# Altium PCB PCB_OLED.PcbDoc
Units mm, origin at the board's own origin, x right, y up, seen from the top; angles counter-clockwise.
Board outline 29.07 x 49.53 mm, 2 copper layers (Top Layer, Bottom Layer), stack 1.622 mm thick; 12 components, 8 nets, 81 pads, 20 vias.
Unrouted connection lines stored in the file: 2.
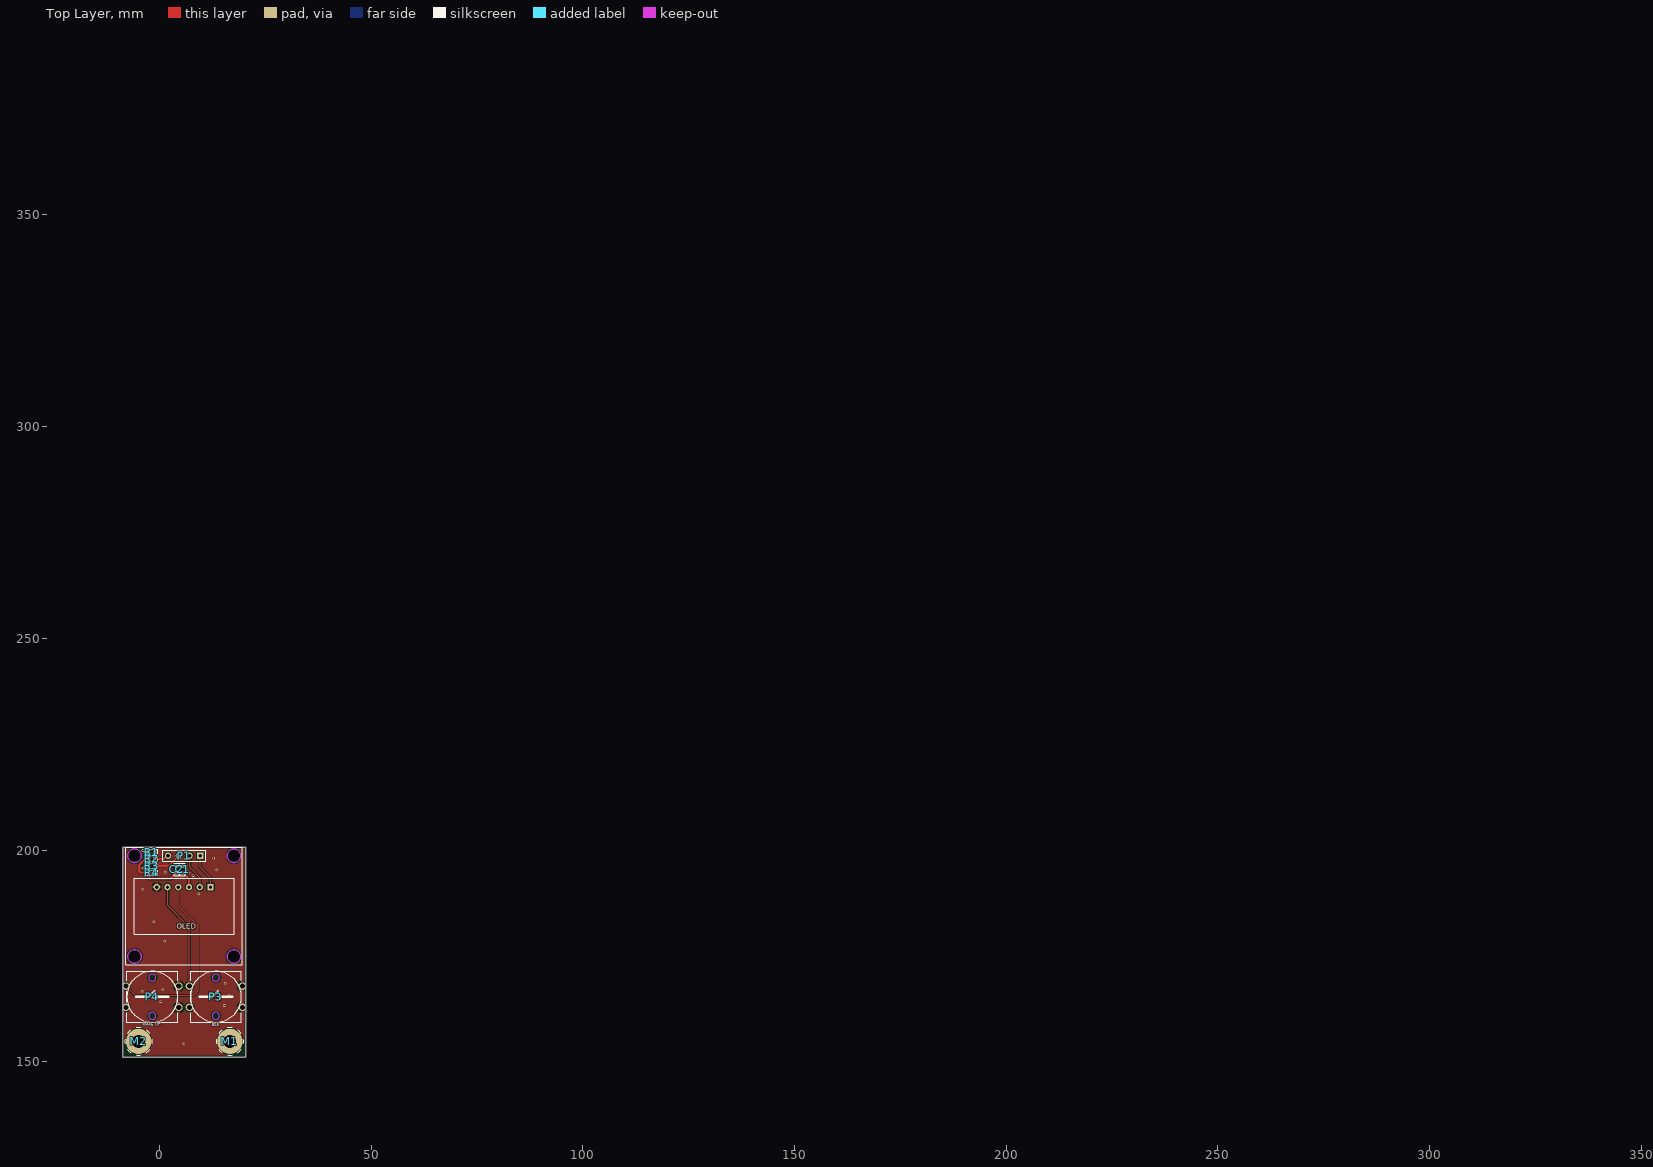
[diagram p0: Top Layer view]
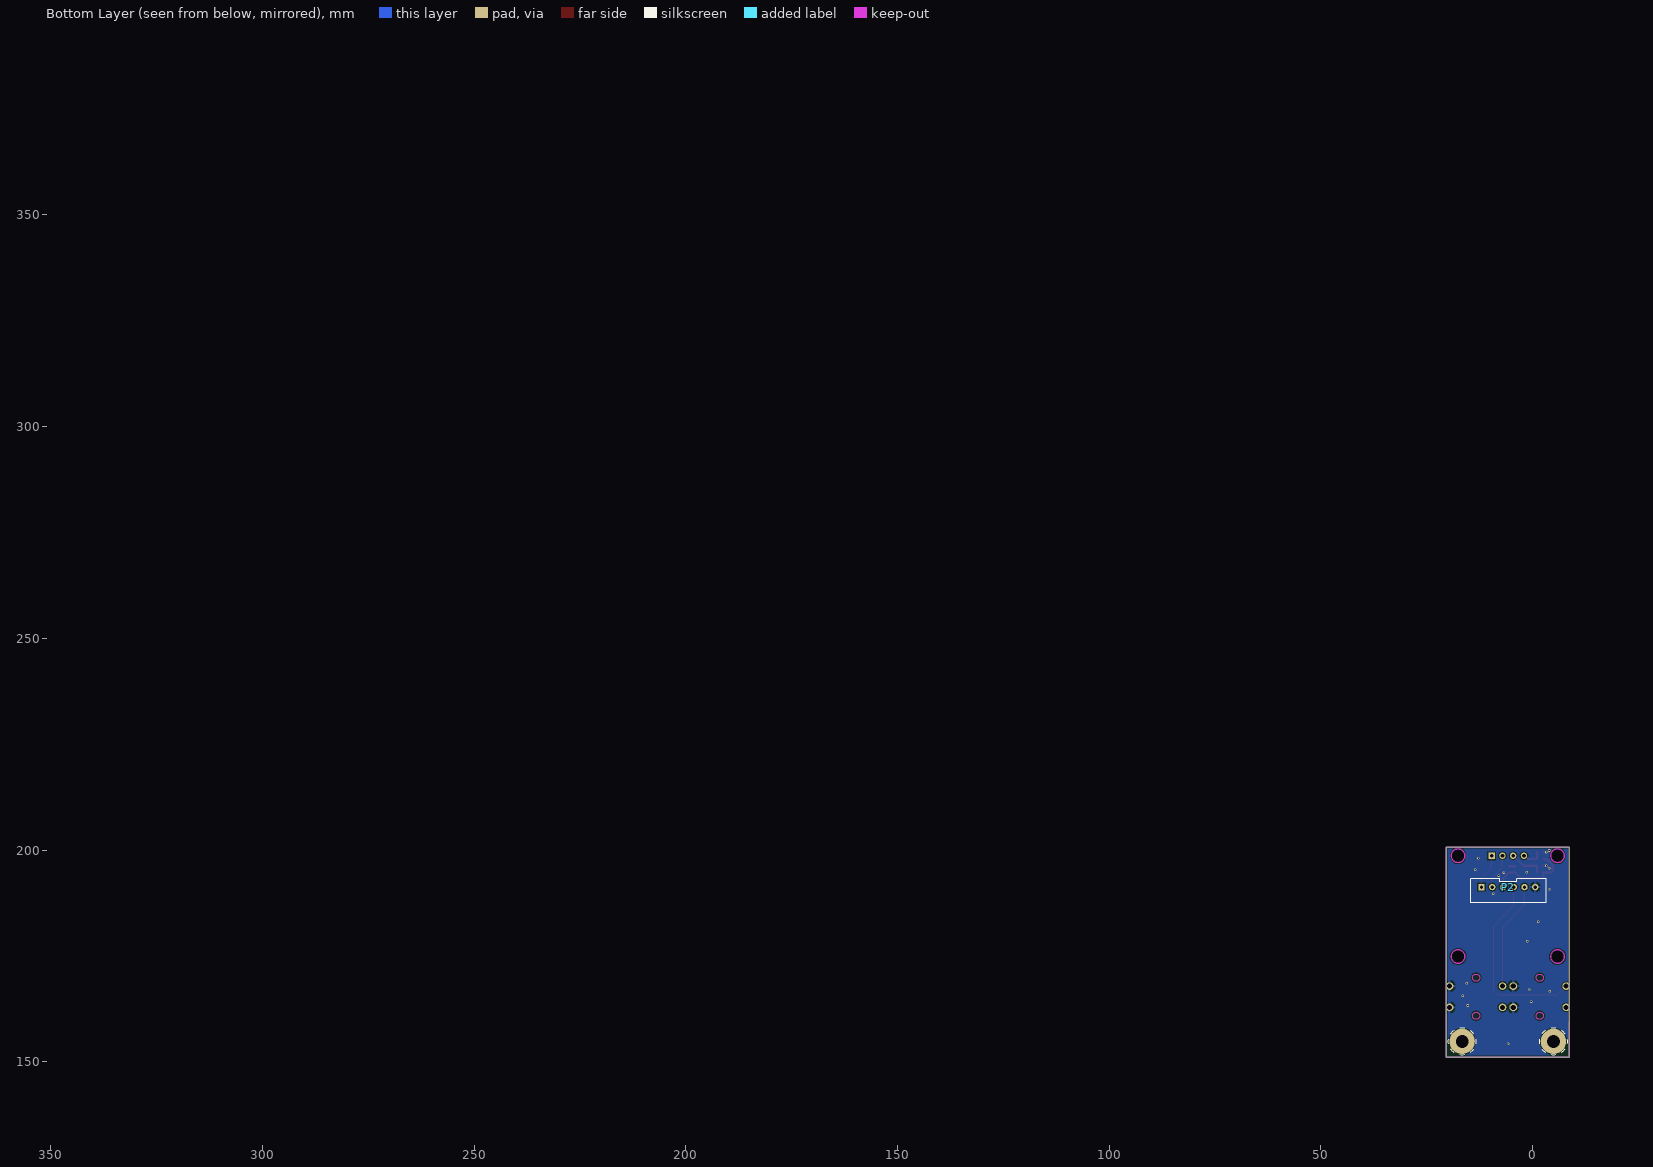
[diagram p1: Bottom Layer view, seen from below]
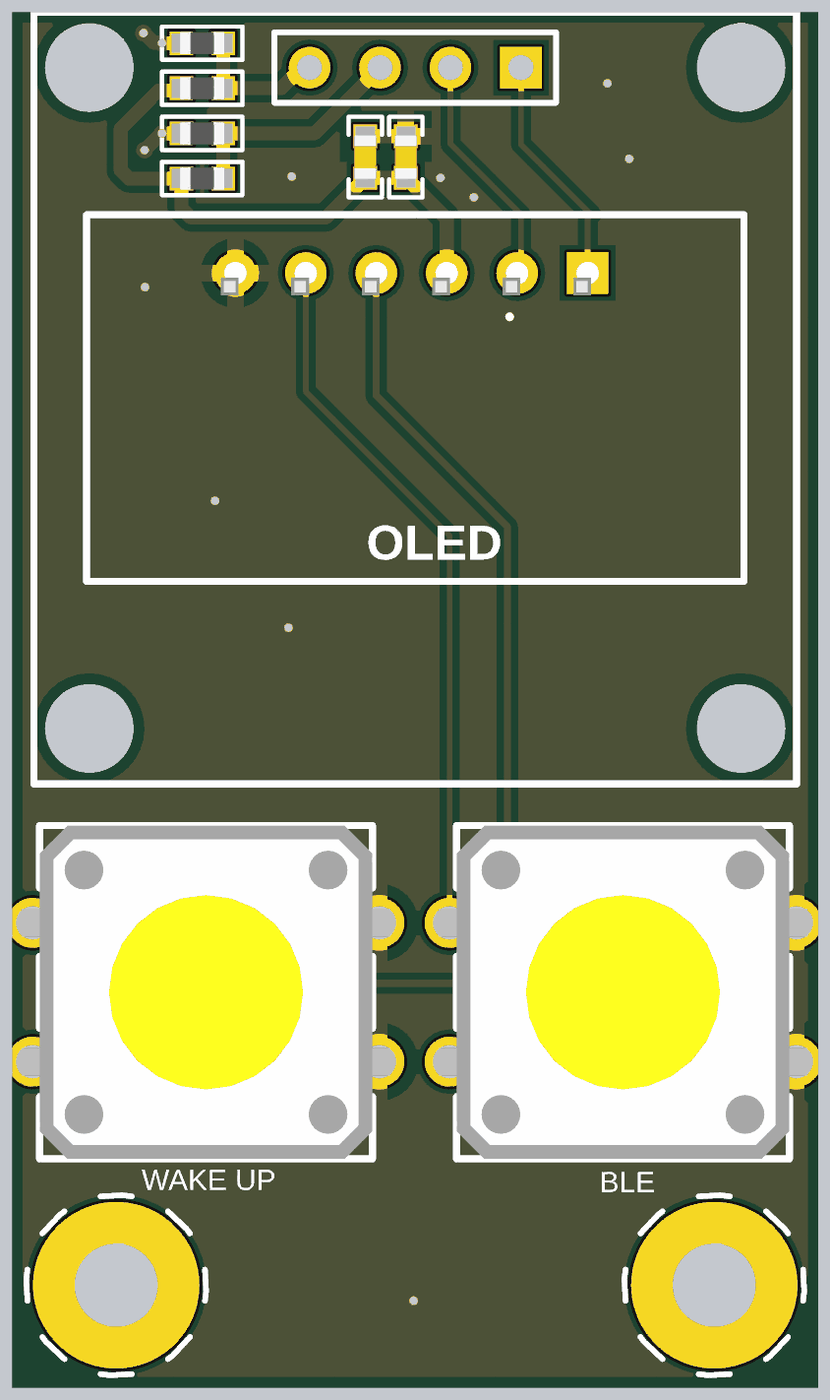
[diagram p2: 3D render of the assembled board from above, using the file's embedded part models]

## Layer stack, top to bottom
Top Solder: solder mask 0.01, Solder Resist, Dk 3.5
Top Layer: signal copper 0.036
Dielectric 1: dielectric 1.55, FR-4, Dk 4.8
Bottom Layer: signal copper 0.036
Bottom Solder: solder mask 0.01, Solder Resist, Dk 3.5

## Board outline
-8.687,151.13 -8.687,159.475 -8.687,200.662 5.85,200.662 20.387,200.662 20.387,159.475 20.387,151.13
cut-out: 17.6,197.062 cw(c17.6,198.662) 16,198.662 cw(c17.6,198.662) 17.6,200.262 cw(c17.6,198.662) 19.2,198.662 cw(c17.6,198.662)
cut-out: 17.6,173.262 cw(c17.6,174.862) 16,174.862 cw(c17.6,174.862) 17.6,176.462 cw(c17.6,174.862) 19.2,174.862 cw(c17.6,174.862)
cut-out: -5.9,173.262 cw(c-5.9,174.862) -7.5,174.862 cw(c-5.9,174.862) -5.9,176.462 cw(c-5.9,174.862) -4.3,174.862 cw(c-5.9,174.862)
cut-out: -5.9,197.062 cw(c-5.9,198.662) -7.5,198.662 cw(c-5.9,198.662) -5.9,200.262 cw(c-5.9,198.662) -4.3,198.662 cw(c-5.9,198.662)

## Design rules (kind name [scope] priority, off if disabled: settings)
Clearance RF [InNet('RF4') or InNet('RF5') or InNet('RF_N1') or InNet('RF_N2') or InNet('RF_N3') or InNet('RF_P1') or InNet('RF_P2')] p1: gap=0.153 ignorepadtopadclearanceinfootprint=FALSE
Clearance bighole [HoleSize>3 vs InPolygon] p2: gap=1.3 ignorepadtopadclearanceinfootprint=FALSE
Clearance "SMALL PAD" [(PadXSize_AllLayers<0.46) or (PadYSize_AllLayers<0.86)] p3: gap=0.2 ignorepadtopadclearanceinfootprint=FALSE except(0.1: THPad-THPad; 0.15: Track-Track Track-SMDPad Track-THPad Track-Region SMDPad-SMDPad SMDPad-Region Region-Region; 0.254: Track-Poly SMDPad-Poly)
Clearance [All] p4: gap=0.254 ignorepadtopadclearanceinfootprint=FALSE except(0.19: Track-Region SMDPad-Region; 0.203: Arc-Track Arc-SMDPad Track-Track Track-SMDPad SMDPad-SMDPad)
HoleSize [All] p1: absolutevalues=TRUE maxlimit=5 minlimit=0.025 maxpercent=80.000 minpercent=20.000
HoleToHoleClearance [All] p1: gap=0 allowstackedmicrovias=TRUE
MinimumSolderMaskSliver [All] p1: minsoldermaskwidth=0
PolygonConnect "big hole" [(PadXSize_AllLayers>0.9)or  (PadySize_AllLayers<0.9)] p1: thpad.connectstyle=Relief thpad.reliefconductorwidth=0.6 thpad.reliefentries=4 thpad.polygonreliefangle="90 Angle" thpad.airgapwidth=0.5 smdpad.connectstyle=Relief smdpad.reliefconductorwidth=0.6 smdpad.reliefentries=4 smdpad.polygonreliefangle="90 Angle" smdpad.airgapwidth=0.5 via.connectstyle=Direct via.reliefconductorwidth=0.254 via.reliefentries=4 via.polygonreliefangle="90 Angle" via.airgapwidth=0.254
PolygonConnect [All] p2: thpad.connectstyle=Relief thpad.reliefconductorwidth=0.5 thpad.reliefentries=4 thpad.polygonreliefangle="90 Angle" thpad.airgapwidth=0.4 smdpad.connectstyle=Relief smdpad.reliefconductorwidth=0.5 smdpad.reliefentries=4 smdpad.polygonreliefangle="90 Angle" smdpad.airgapwidth=0.4 via.connectstyle=Direct via.reliefconductorwidth=0.254 via.reliefentries=4 via.polygonreliefangle="90 Angle" via.airgapwidth=0.254
RoutingVias [All] p1: holewidth=0.3 width=0.6 viastyle="Through Hole" minholewidth=0.3 minwidth=0.6 maxholewidth=0.3 maxwidth=0.6
SilkToSilkClearance [All] p1: silktosilkclearance=0
SilkToSolderMaskClearance [IsPad] p1: minsilkscreentomaskgap=0 clearancetoexposedcopper=TRUE
SolderMaskExpansion [All] p1: expansion=0.102
Width [All] p1: maxlimit=5 minlimit=0.1 preferedwidth=0.254
25 further rules are at their usual default settings.

## Components (designator, comment, footprint, x,y, rotation, side; value= is the part's Value field where it differs from the comment)
C1 "104/50V" "CAPC-0603 (1608) - HD" 5.512,195.441 r270 top
C2 "106/10V" "CAPC-0603 (1608) - HD" 4.05,195.441 r270 top
M1 "HOLE" HOLE_3MM_6MM 16.632,154.811 r0 top
M2 "HOLE" HOLE_3MM_6MM -4.932,154.811 r0 top
P1 "Header 4P" HDR1X4 9.66,198.662 r180 top
P2 "XH2.54mm" XH2.54-6p 6.985,191.262 r180 bottom
P3 "=Value" "B3F BUTTON" 13.339,165.362 r0 top
P4 "=Value" "B3F BUTTON" -1.693,165.362 r0 top
R1 "0R" "RESC-0603 (1608) - HD" -1.829,199.542 r180 top
R2 "NF" "RESC-0603 (1608) - HD" -1.829,197.918 r180 top value=0R
R3 "NF" "RESC-0603 (1608) - HD" -1.829,196.293 r180 top value=0R
R4 "0R" "RESC-0603 (1608) - HD" -1.829,194.668 r180 top

## Footprints (in the part's own frame and the unit in brackets; to place one, negate y for a bottom-side part, rotate by r counter-clockwise, add the part's x,y. Pads: shape width x height; smd on the part's side, far side on the other; paste and mask are expansions set on the pad)
"B3F BUTTON" [mm]
  round 1.8 hole 1.2: 1(-6.25,2.5) 2(6.25,2.5) 3(-6.25,-2.5) 4(6.25,-2.5)
  Keep-Out Layer circle w0.254: c0,4.5 r0.85
  Keep-Out Layer circle w0.254: c0,-4.5 r0.85
  silkscreen extent -6,-6 6,6, body extent -7,-6 7,6, height 7.4
"CAPC-0603 (1608) - HD" [mm] "Resistor, Chip; 1.60 mm L X 0.80 mm W X 0.50 mm H body"
  rect 0.85x0.85 smd paste-0.075 mask+0.1: 1(-0.75,0) 2(0.75,0)
  silkscreen extent -1.45,-0.6 1.45,0.6, body extent -0.8,-0.4 0.8,0.4, height 0.6
HDR1X4 [mm] "Connector; Header; 4 Position"
  rect 1.5x1.5 hole 0.9: 1(0,0)
  round 1.5 hole 0.9: 2(2.54,0) 3(5.08,0) 4(7.62,0)
  silkscreen extent -1.27,-1.27 8.89,1.27
HOLE_3MM_6MM [mm]
  round 6 hole 3: 0(0,0)
  silkscreen extent -3.25,-3.25 3.25,3.25
"RESC-0603 (1608) - HD" [mm] "Resistor, Chip; 1.60 mm L X 0.80 mm W X 0.50 mm H body"
  rect 0.85x0.85 smd paste-0.075 mask+0.1: 1(-0.751,0) 2(0.749,0)
  silkscreen extent -1.45,-0.6 1.45,0.6, body extent -0.8,-0.4 0.8,0.4, height 0.5
XH2.54-6p [mm]
  rect 1.5x1.5 hole 0.8: 1(-5.08,0)
  round 1.5 hole 0.8: 2(-2.54,0) 3(0,0) 4(2.54,0) 5(5.08,0) 6(7.62,0)
  silkscreen extent -7.62,-3.7 10.16,2, body extent -7.21,-3.84 10.16,2, height 7.21

## Part data
C1: library part C0603C104K5RACTU, "CAP CER 0.1uF 50V 10% X7R 0603", MFR=KEMET, Company ID=VT00574, MPN=C0603C104K5RACTU, Solder=SMT
C2: library part CL10A106KP8NNNC, "CAP CER 10uF 10% 10V X5R 0603", MFR="Samsung Electro-Mechanics", Category=Capacitor, Conpany ID=VT00807, MPN=CL10A106KP8NNNC, Solder=SMT
M1 M2: library part HOLE_2_4/2_5/3_5/3_6, "HOLE 2_4/2_5/3_5/3_6", MPN=None, ClassName=MECH_HOLE, CompanyID=VT-, Solder="Not Fill"
P1: library part "Header 4x1", "Header, 4 Pin Pitch 2.54mm", MPN=S1012EC-40-ND, Company ID=VT-00125, Solder=WAVE
P2: library part XH2.54-6p, "XH2.54mmm - 6P 180 degree", MFR=CHINA, MPN=XH2.54-6P
P3 P4: library part B3F, "BUTTON 12X12X7.3MM", Category=Button, MPN=B3F, Solder=Wave, URL=http://linhkienchatluong.vn/nut-nhan-12x12-4p-dip/nut-nhan-4-chan-12x12x73mm-b3f-4055_sp689_ct1833.aspx
R1 R2 R3 R4: library part RC0603FR-070RL, "RES SMD 0.0OHM JUMPER 1/10W 0603", MFR=Yageo, Category=Resistor, Company ID=VT00423, MPN=RC0603FR-070RL, Solder=SMT

## Free pads (board coordinates)
  round 3.668 on Mech1: 1(-18.961,200.752) 1(4.039,138.252) 1(4.039,218.252) 1(27.039,200.752)
  round 0.254 on Keep-Out: 1(-17.961,225.152) 1(-17.961,225.152) 1(-17.961,225.152)
  round 0.254 on Mech1: 1(2.331,218.252) 1(5.746,218.252)
  round 0.254 on Mech2: 1(283.171,304.082) 1(283.171,304.082) 1(283.171,304.082) 1(283.171,380.082) 1(283.171,380.082) 1(283.171,380.082) 1(285.171,302.082) 1(285.171,302.082) 1(285.171,382.082) 1(285.171,382.082) 1(290.071,297.182) 1(290.071,297.182) 1(290.071,386.982) 1(290.071,386.982) 1(292.071,295.182) 1(292.071,295.182) 1(292.071,295.182) 1(292.071,388.982) 1(292.071,388.982) 1(292.071,388.982) 1(336.071,295.182) 1(336.071,295.182) 1(336.071,295.182) 1(336.071,388.982) 1(336.071,388.982) 1(336.071,388.982) 1(338.071,297.182) 1(338.071,297.182) 1(338.071,386.982) 1(338.071,386.982) 1(342.971,302.082) 1(342.971,382.082) 1(342.971,302.082) 1(342.971,382.082) 1(344.971,304.082) 1(344.971,304.082) 1(344.971,304.082) 1(344.971,380.082) 1(344.971,380.082) 1(344.971,380.082)

## Via types
v1: diameter 0.6, hole 0.3, Top Layer to Bottom Layer, tented both sides, 20 vias

## Nets (pads, with @x,y where several pads share a name; then routed paths per layer and width w, separated by ;. In a path a pad name is that pad's centre, name@x,y a point inside that pad or via, vN(x,y) a via of type N, cw(c..) or ccw(c..) an arc to the next point about the centre after c; other vN are vias at no path point)
+3V3: C1.2 C2.2 P2.3 R2.2 R4.2 | length 20.5
  Top Layer w0.5: R2.2 -2.658,197.838 -3.409,197.838 -3.702,197.545 -3.702,197.531 -4.769,196.464 -4.769,194.961 -4.476,194.668 R4.2 -2.578,193.611 -2.229,193.262 2.621,193.262 C2.2 C1.2 6.985,193.218 P2.3
BLE_BTN: P2.4 P4.1 P4.2 | length 44.9
  Top Layer w0.254: P4.1 -5.765,165.684 8.103,165.684 9.169,166.751 9.169,182.118 4.445,186.842 P2.4
GND: C1.1 C2.1 P2.6 P3.4 P4.4 R1.2 R3.2 | length 4.6
  Top Layer w0.5: v1(-3.948,199.905) -3.921,199.905 -3.577,199.562 -3.299,199.562 v1(-3.28,199.542) R1.2 ; v1(-3.909,195.693) -3.895,195.693 -3.295,196.293 v1(-3.28,196.293) R3.2 ; C2.1 C1.1
  other v1: 5.791,154.254 15.291,163.297 0.279,164.235 16.51,165.608 -4.039,166.634 0.769,166.969 15.519,168.568 1.28,178.49 -1.367,183.062 9.254,189.687 -3.895,190.756 7.963,193.989 6.758,194.691 1.399,194.739 13.564,195.377 12.776,198.095
NetP1_3: P1.3 R3.1 R4.1 | length 8.3
  Top Layer w0.5: R4.1 R3.1 2.21,196.293 P1.3
NetP1_4: P1.4 R1.1 R2.1 | length 5.1
  Top Layer w0.5: R1.1 R2.1 1.025,197.918 1.769,198.662 P1.4
SCL: P1.2 P2.2 | length 8.8
  Top Layer w0.203: P1.2 7.12,195.902 9.66,193.362 9.66,191.795 9.254,191.389 9.381,191.262 P2.2
SDA: P1.1 P2.1 | length 8.5
  Top Layer w0.203: P1.1 9.66,195.902 12.2,193.362 12.065,193.227 P2.1
WAKEUP_BTN: P2.5 P3.1 P3.2 | length 25.5
  Top Layer w0.203: P2.5 1.905,186.995 7.089,181.81 P3.1
pads on no net: M1.0 M2.0 P3.3 P4.3

## Polygon pours and split planes (outlines as drawn)
GND on Bottom Layer "GND_L02_P001" (solid, remove dead copper, pour order 1): -8.687,200.662 -8.687,151.13 20.387,151.13 20.387,200.662
GND on Top Layer "GND_L01_P000" (solid, remove dead copper, pour order 0): -8.687,200.662 -8.687,151.13 20.387,151.13 20.387,200.662

## Keep-outs
Keep-Out Layer:
  circle w0.254: c17.6,198.662 r1.6
  circle w0.254: c-5.9,198.662 r1.6
  circle w0.254: c-5.9,174.862 r1.6
  circle w0.254: c17.6,174.862 r1.6
  lines w0.254: -8.687,151.13 -8.687,159.475 -8.687,200.662 5.85,200.662 20.387,200.662 20.387,159.475 20.387,151.13 -8.687,151.13

## Silkscreen, mask and mechanical layers (free items; w line width, h text height)
Top Overlay:
  circle w0.254: c13.339,165.362 r6
  circle w0.254: c-1.693,165.362 r6
  lines w0.254: -7.9,172.862 19.6,172.862 19.6,200.662 -7.9,200.662 -7.9,172.862 ; -6,180.162 -6,193.362 5.85,193.362 17.7,193.362 17.7,180.162 -6,180.162
  text "OLED" at 4.089,180.948 h2
  text "WAKE UP" at -4.013,158.242 h1.2
  text "BLE" at 12.497,158.166 h1.2
Mechanical 1:
  lines w0.254: -25.861,216.252 cw(c-24.861,216.252) -24.861,217.252 ccw(c-24.861,223.152) -18.961,223.152 cw(c-17.961,223.152) -17.961,224.152 ; 26.039,224.152 cw(c26.039,223.152) 27.039,223.152 ccw(c32.939,223.152) 32.939,217.252 cw(c32.939,216.252) 33.939,216.252
Mechanical 2:
  lines w0.254: 283.171,304.082 ccw(c285.171,304.082) 285.171,302.082 cw(c285.171,297.182) 290.071,297.182 ccw(c292.071,297.182) 292.071,295.182 336.071,295.182 ccw(c336.071,297.182) 338.071,297.182 cw(c342.971,297.182) 342.971,302.082 ccw(c342.971,304.082) 344.971,304.082 344.971,380.082 ccw(c342.971,380.082) 342.971,382.082 cw(c342.971,386.982) 338.071,386.982 ccw(c336.071,386.982) 336.071,388.982 292.071,388.982 ccw(c292.071,386.982) 290.071,386.982 cw(c285.171,386.982) 285.171,382.082 ccw(c285.171,380.082) 283.171,380.082 283.171,304.082 ; 284.171,304.082 ccw(c285.171,304.082) 285.171,303.082 cw(c285.171,297.182) 291.071,297.182 ccw(c292.071,297.182) 292.071,296.182 336.071,296.182 ccw(c336.071,297.182) 337.071,297.182 cw(c342.971,297.182) 342.971,303.082 ccw(c342.971,304.082) 343.971,304.082 343.971,380.082 ccw(c342.971,380.082) 342.971,381.082 cw(c342.971,386.982) 337.071,386.982 ccw(c336.071,386.982) 336.071,387.982 292.071,387.982 ccw(c292.071,386.982) 291.071,386.982 cw(c285.171,386.982) 285.171,381.082 ccw(c285.171,380.082) 284.171,380.082 284.171,304.082